# EAGLE board trasera_7_ea7gib6 (EAGLE 7.6.0), part 1 of 3
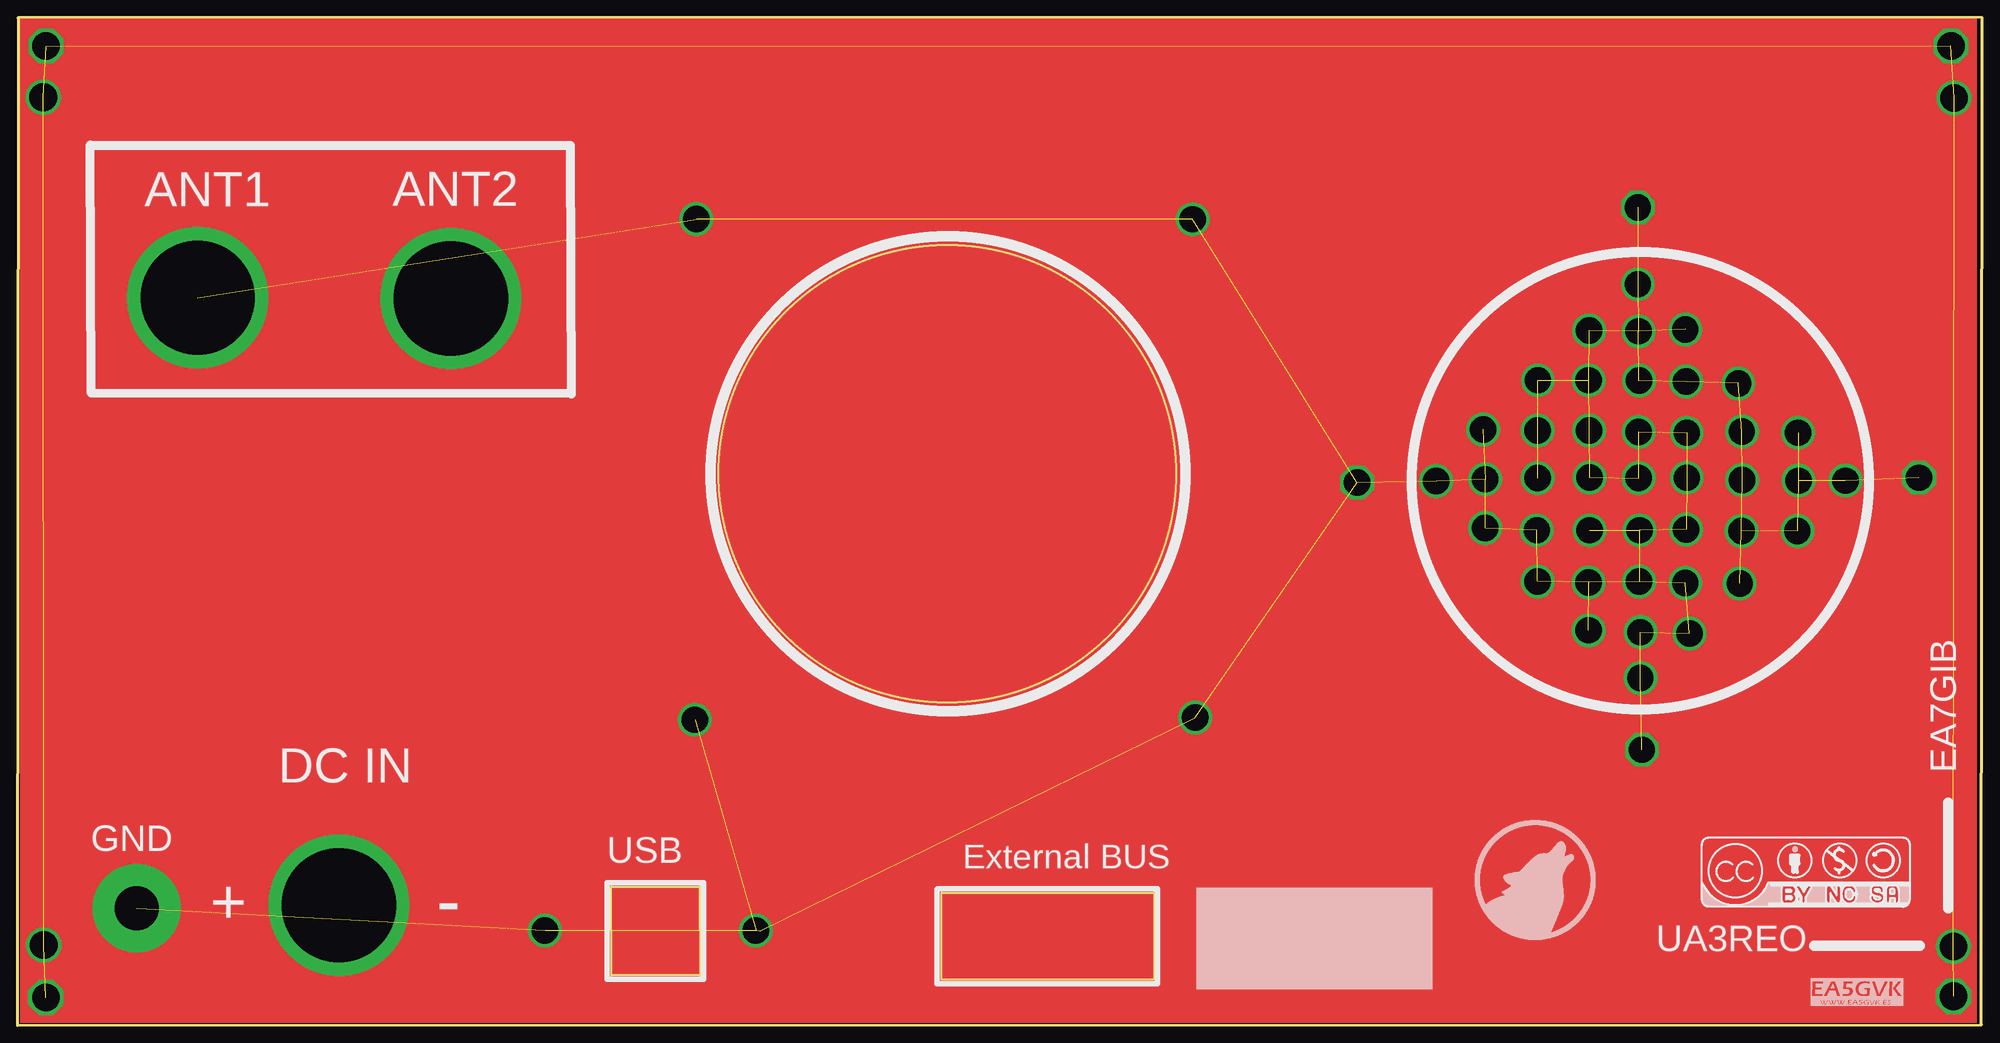
[diagram p0: board, top side]
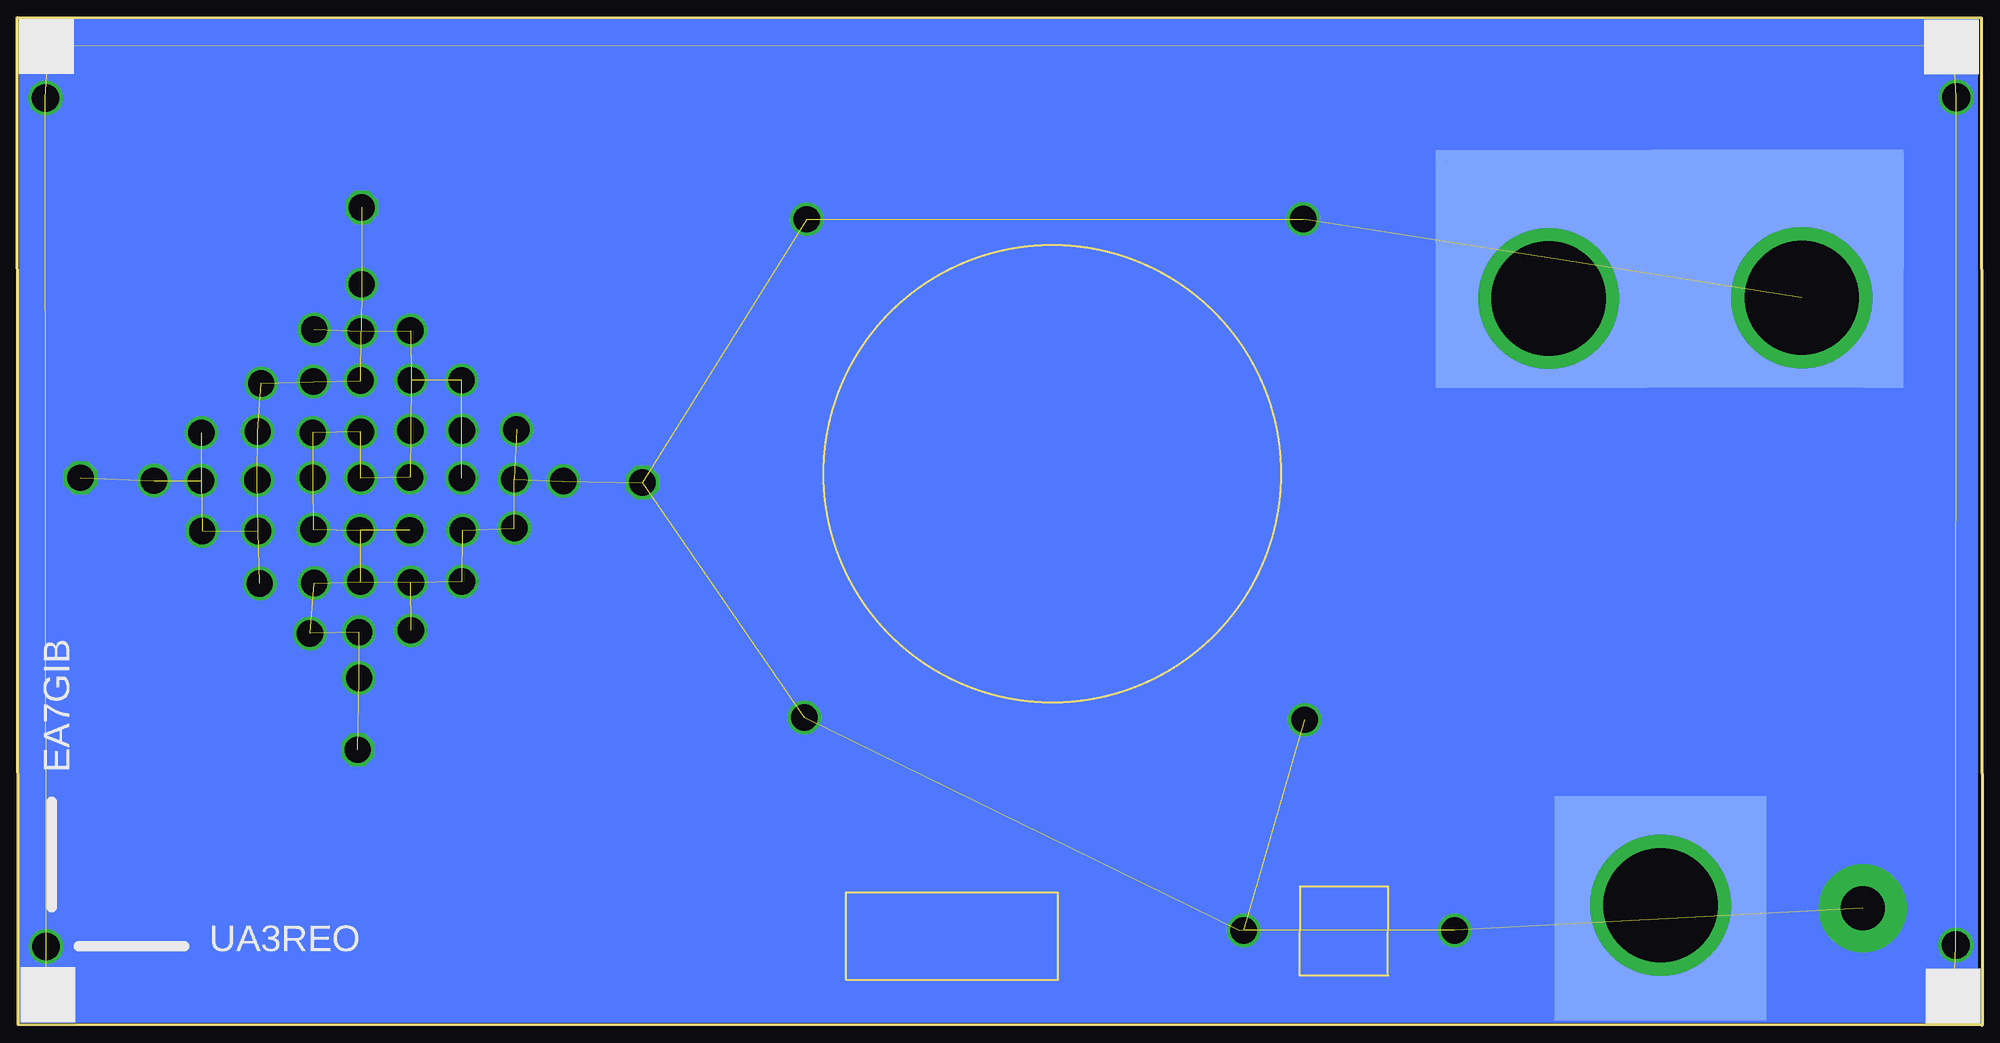
[diagram p1: board, bottom side, seen from below]

Size 283.9 x 145.6 mm. Coordinates in mm from the lower left corner, seen from the top.
Outline: 133.56,19.17 164.2,19.17 164.2,6.58 133.5,6.58 133.5,19.14
Outline: 85.83,20.03 98.6,20.03 98.63,7.22 85.83,7.22 85.8,19.96
Outline: 0,0 283.78,0.09 283.9,145.6 0.12,145.51 0,0
Outline: circle at 134.39,79.67 radius 33.02
Copper layers (1*16): Top 0.035mm / dielectric 1.5mm / Bottom 0.035mm
Design rules "default": minimum track width 10mil, minimum drill 24mil, track to track 8mil, track to pad 8mil, pad to pad 8mil, via to via 8mil, smd to smd 8mil, copper to edge 40mil, drill to drill 8mil, minimum pad ring 10mil, minimum via ring 8mil, stop-mask expansion 4mil, vias tented up to drill 0mil, thermal gap 10mil

## Footprints (pad centres in the part's own frame; a part is rotated, then mirrored left to right if it is on the bottom)
TP15SQ = smd 1.5 x 1.5: TP 0,0

## Placement (x,y rotation side)
E$1  [CC-NC-BY]  243.41,17.13 0 top
E$2  [TP15SQ]  12.1,125.24 0 bottom
E$3  [TP15SQ]  13.35,125.24 0 bottom
E$4  [TP15SQ]  12.1,123.78 0 bottom
E$5  [TP15SQ]  13.35,123.78 0 bottom
E$6  [TP15SQ]  12.1,122.38 0 bottom
E$7  [TP15SQ]  13.35,122.38 0 bottom
E$8  [TP15SQ]  12.1,120.98 0 bottom
E$9  [TP15SQ]  13.35,120.98 0 bottom
E$10  [TP15SQ]  12.1,119.51 0 bottom
E$11  [TP15SQ]  13.35,119.51 0 bottom
E$12  [TP15SQ]  12.1,118.11 0 bottom
E$13  [TP15SQ]  13.35,118.11 0 bottom
E$14  [TP15SQ]  14.3,125.24 0 bottom
E$15  [TP15SQ]  15.76,125.24 0 bottom
E$16  [TP15SQ]  18.44,125.24 0 bottom
E$17  [TP15SQ]  17.22,125.24 0 bottom
E$18  [TP15SQ]  19.54,125.24 0 bottom
E$19  [TP15SQ]  20.79,125.24 0 bottom
E$20  [EA5GVK1]  259.11,2.83 0 top
E$21  [TP15SQ]  14.3,123.78 0 bottom
E$22  [TP15SQ]  15.76,123.78 0 bottom
E$23  [TP15SQ]  18.44,123.78 0 bottom
E$24  [TP15SQ]  17.22,123.78 0 bottom
E$25  [TP15SQ]  19.54,123.78 0 bottom
E$26  [TP15SQ]  20.79,123.78 0 bottom
E$27  [TP15SQ]  14.3,122.38 0 bottom
E$28  [TP15SQ]  15.76,122.38 0 bottom
E$29  [TP15SQ]  18.44,122.38 0 bottom
E$30  [TP15SQ]  17.22,122.38 0 bottom
E$31  [TP15SQ]  19.54,122.38 0 bottom
E$32  [TP15SQ]  20.79,122.38 0 bottom
E$33  [TP15SQ]  14.3,120.98 0 bottom
E$34  [TP15SQ]  15.76,120.98 0 bottom
E$35  [TP15SQ]  18.44,120.98 0 bottom
E$36  [TP15SQ]  17.22,120.98 0 bottom
E$37  [TP15SQ]  19.54,120.98 0 bottom
E$38  [TP15SQ]  20.79,120.98 0 bottom
E$39  [TP15SQ]  14.3,119.51 0 bottom
E$40  [TP15SQ]  15.76,119.51 0 bottom
E$41  [TP15SQ]  18.44,119.51 0 bottom
E$42  [TP15SQ]  17.22,119.51 0 bottom
E$43  [TP15SQ]  19.54,119.51 0 bottom
E$44  [TP15SQ]  20.79,119.51 0 bottom
E$45  [TP15SQ]  14.3,118.11 0 bottom
E$46  [TP15SQ]  15.76,118.11 0 bottom
E$47  [TP15SQ]  18.44,118.11 0 bottom
E$48  [TP15SQ]  17.22,118.11 0 bottom
E$49  [TP15SQ]  19.54,118.11 0 bottom
E$50  [TP15SQ]  20.79,118.11 0 bottom
E$51  [TP15SQ]  12.1,117.1 0 bottom
E$52  [TP15SQ]  13.35,117.1 0 bottom
E$53  [TP15SQ]  12.1,115.64 0 bottom
E$54  [TP15SQ]  13.35,115.64 0 bottom
E$55  [TP15SQ]  12.1,114.24 0 bottom
E$56  [TP15SQ]  13.35,114.24 0 bottom
E$57  [TP15SQ]  12.1,112.84 0 bottom
E$58  [TP15SQ]  13.35,112.84 0 bottom
E$59  [TP15SQ]  12.1,111.37 0 bottom
E$60  [TP15SQ]  13.35,111.37 0 bottom
E$61  [TP15SQ]  12.1,109.97 0 bottom
E$62  [TP15SQ]  13.35,109.97 0 bottom
E$63  [TP15SQ]  14.3,117.1 0 bottom
E$64  [TP15SQ]  15.76,117.1 0 bottom
E$65  [TP15SQ]  18.44,117.1 0 bottom
E$66  [TP15SQ]  17.22,117.1 0 bottom
E$67  [TP15SQ]  19.54,117.1 0 bottom
E$68  [TP15SQ]  20.79,117.1 0 bottom
E$69  [TP15SQ]  14.3,115.64 0 bottom
E$70  [TP15SQ]  15.76,115.64 0 bottom
E$71  [TP15SQ]  18.44,115.64 0 bottom
E$72  [TP15SQ]  17.22,115.64 0 bottom
E$73  [TP15SQ]  19.54,115.64 0 bottom
E$74  [TP15SQ]  20.79,115.64 0 bottom
E$75  [TP15SQ]  14.3,114.24 0 bottom
E$76  [TP15SQ]  15.76,114.24 0 bottom
E$77  [TP15SQ]  18.44,114.24 0 bottom
E$78  [TP15SQ]  17.22,114.24 0 bottom
E$79  [TP15SQ]  19.54,114.24 0 bottom
E$80  [TP15SQ]  20.79,114.24 0 bottom
E$81  [TP15SQ]  14.3,112.84 0 bottom
E$82  [TP15SQ]  15.76,112.84 0 bottom
E$83  [TP15SQ]  18.44,112.84 0 bottom
E$84  [TP15SQ]  17.22,112.84 0 bottom
E$85  [TP15SQ]  19.54,112.84 0 bottom
E$86  [TP15SQ]  20.79,112.84 0 bottom
E$87  [TP15SQ]  14.3,111.37 0 bottom
E$88  [TP15SQ]  15.76,111.37 0 bottom
E$89  [TP15SQ]  18.44,111.37 0 bottom
E$90  [TP15SQ]  17.22,111.37 0 bottom
E$91  [TP15SQ]  19.54,111.37 0 bottom
E$92  [TP15SQ]  20.79,111.37 0 bottom
E$93  [TP15SQ]  14.3,109.97 0 bottom
E$94  [TP15SQ]  15.76,109.97 0 bottom
E$95  [TP15SQ]  18.44,109.97 0 bottom
E$96  [TP15SQ]  17.22,109.97 0 bottom
E$97  [TP15SQ]  19.54,109.97 0 bottom
E$98  [TP15SQ]  20.79,109.97 0 bottom
E$99  [TP15SQ]  12.13,109.64 0 bottom
E$100  [TP15SQ]  13.38,109.64 0 bottom
E$101  [TP15SQ]  12.13,108.17 0 bottom
E$102  [TP15SQ]  13.38,108.17 0 bottom
E$103  [TP15SQ]  12.13,106.77 0 bottom
E$104  [TP15SQ]  13.38,106.77 0 bottom
E$105  [TP15SQ]  12.13,105.37 0 bottom
E$106  [TP15SQ]  13.38,105.37 0 bottom
E$107  [TP15SQ]  12.13,103.91 0 bottom
E$108  [TP15SQ]  13.38,103.91 0 bottom
E$109  [TP15SQ]  12.13,102.5 0 bottom
E$110  [TP15SQ]  13.38,102.5 0 bottom
E$111  [TP15SQ]  14.33,109.64 0 bottom
E$112  [TP15SQ]  15.79,109.64 0 bottom
E$113  [TP15SQ]  18.47,109.64 0 bottom
E$114  [TP15SQ]  17.25,109.64 0 bottom
E$115  [TP15SQ]  19.57,109.64 0 bottom
E$116  [TP15SQ]  20.82,109.64 0 bottom
E$117  [TP15SQ]  14.33,108.17 0 bottom
E$118  [TP15SQ]  15.79,108.17 0 bottom
E$119  [TP15SQ]  18.47,108.17 0 bottom
E$120  [TP15SQ]  17.25,108.17 0 bottom
E$121  [TP15SQ]  19.57,108.17 0 bottom
E$122  [TP15SQ]  20.82,108.17 0 bottom
E$123  [TP15SQ]  14.33,106.77 0 bottom
E$124  [TP15SQ]  15.79,106.77 0 bottom
E$125  [TP15SQ]  18.47,106.77 0 bottom
E$126  [TP15SQ]  17.25,106.77 0 bottom
E$127  [TP15SQ]  19.57,106.77 0 bottom
E$128  [TP15SQ]  20.82,106.77 0 bottom
E$129  [TP15SQ]  14.33,105.37 0 bottom
E$130  [TP15SQ]  15.79,105.37 0 bottom
E$131  [TP15SQ]  18.47,105.37 0 bottom
E$132  [TP15SQ]  17.25,105.37 0 bottom
E$133  [TP15SQ]  19.57,105.37 0 bottom
E$134  [TP15SQ]  20.82,105.37 0 bottom
E$135  [TP15SQ]  14.33,103.91 0 bottom
E$136  [TP15SQ]  15.79,103.91 0 bottom
E$137  [TP15SQ]  18.47,103.91 0 bottom
E$138  [TP15SQ]  17.25,103.91 0 bottom
E$139  [TP15SQ]  19.57,103.91 0 bottom
E$140  [TP15SQ]  20.82,103.91 0 bottom
E$141  [TP15SQ]  14.33,102.5 0 bottom
E$142  [TP15SQ]  15.79,102.5 0 bottom
E$143  [TP15SQ]  18.47,102.5 0 bottom
E$144  [TP15SQ]  17.25,102.5 0 bottom
E$145  [TP15SQ]  19.57,102.5 0 bottom
E$146  [TP15SQ]  20.82,102.5 0 bottom
E$147  [TP15SQ]  12.13,101.5 0 bottom
E$148  [TP15SQ]  13.38,101.5 0 bottom
E$149  [TP15SQ]  12.13,100.04 0 bottom
E$150  [TP15SQ]  13.38,100.04 0 bottom
E$151  [TP15SQ]  12.13,98.63 0 bottom
E$152  [TP15SQ]  13.38,98.63 0 bottom
E$153  [TP15SQ]  12.13,97.23 0 bottom
E$154  [TP15SQ]  13.38,97.23 0 bottom
E$155  [TP15SQ]  12.13,95.77 0 bottom
E$156  [TP15SQ]  13.38,95.77 0 bottom
E$157  [TP15SQ]  14.33,101.5 0 bottom
E$158  [TP15SQ]  15.79,101.5 0 bottom
E$159  [TP15SQ]  18.47,101.5 0 bottom
E$160  [TP15SQ]  17.25,101.5 0 bottom
E$161  [TP15SQ]  19.57,101.5 0 bottom
E$162  [TP15SQ]  20.82,101.5 0 bottom
E$163  [TP15SQ]  14.33,100.04 0 bottom
E$164  [TP15SQ]  15.79,100.04 0 bottom
E$165  [TP15SQ]  18.47,100.04 0 bottom
E$166  [TP15SQ]  17.25,100.04 0 bottom
E$167  [TP15SQ]  19.57,100.04 0 bottom
E$168  [TP15SQ]  20.82,100.04 0 bottom
E$169  [TP15SQ]  14.33,98.63 0 bottom
E$170  [TP15SQ]  15.79,98.63 0 bottom
E$171  [TP15SQ]  18.47,98.63 0 bottom
E$172  [TP15SQ]  17.25,98.63 0 bottom
E$173  [TP15SQ]  19.57,98.63 0 bottom
E$174  [TP15SQ]  20.82,98.63 0 bottom
E$175  [TP15SQ]  14.33,97.23 0 bottom
E$176  [TP15SQ]  15.79,97.23 0 bottom
E$177  [TP15SQ]  18.47,97.23 0 bottom
E$178  [TP15SQ]  17.25,97.23 0 bottom
E$179  [TP15SQ]  19.57,97.23 0 bottom
E$180  [TP15SQ]  20.82,97.23 0 bottom
E$181  [TP15SQ]  14.33,95.77 0 bottom
E$182  [TP15SQ]  15.79,95.77 0 bottom
E$183  [TP15SQ]  18.47,95.77 0 bottom
E$184  [TP15SQ]  17.25,95.77 0 bottom
E$185  [TP15SQ]  19.57,95.77 0 bottom
E$186  [TP15SQ]  20.82,95.77 0 bottom
E$187  [TP15SQ]  21.46,125.24 0 bottom
E$188  [TP15SQ]  22.92,125.24 0 bottom
E$189  [TP15SQ]  21.46,123.78 0 bottom
E$190  [TP15SQ]  22.92,123.78 0 bottom
E$191  [TP15SQ]  21.46,122.38 0 bottom
E$192  [TP15SQ]  22.92,122.38 0 bottom
E$193  [TP15SQ]  21.46,120.98 0 bottom
E$194  [TP15SQ]  22.92,120.98 0 bottom
E$195  [TP15SQ]  21.46,119.51 0 bottom
E$196  [TP15SQ]  22.92,119.51 0 bottom
E$197  [TP15SQ]  21.46,118.11 0 bottom
E$198  [TP15SQ]  22.92,118.11 0 bottom
E$199  [TP15SQ]  21.46,117.1 0 bottom
E$200  [TP15SQ]  22.92,117.1 0 bottom
E$201  [TP15SQ]  21.46,115.64 0 bottom
E$202  [TP15SQ]  22.92,115.64 0 bottom
E$203  [TP15SQ]  21.46,114.24 0 bottom
E$204  [TP15SQ]  22.92,114.24 0 bottom
E$205  [TP15SQ]  21.46,112.84 0 bottom
E$206  [TP15SQ]  22.92,112.84 0 bottom
E$207  [TP15SQ]  21.46,111.37 0 bottom
E$208  [TP15SQ]  22.92,111.37 0 bottom
E$209  [TP15SQ]  21.46,109.97 0 bottom
E$210  [TP15SQ]  22.92,109.97 0 bottom
E$211  [TP15SQ]  21.49,109.64 0 bottom
E$212  [TP15SQ]  22.95,109.64 0 bottom
E$213  [TP15SQ]  21.49,108.17 0 bottom
E$214  [TP15SQ]  22.95,108.17 0 bottom
E$215  [TP15SQ]  21.49,106.77 0 bottom
E$216  [TP15SQ]  22.95,106.77 0 bottom
E$217  [TP15SQ]  21.49,105.37 0 bottom
E$218  [TP15SQ]  22.95,105.37 0 bottom
E$219  [TP15SQ]  21.49,103.91 0 bottom
E$220  [TP15SQ]  22.95,103.91 0 bottom
E$221  [TP15SQ]  21.49,102.5 0 bottom
E$222  [TP15SQ]  22.95,102.5 0 bottom
E$223  [TP15SQ]  21.49,101.5 0 bottom
E$224  [TP15SQ]  22.95,101.5 0 bottom
E$225  [TP15SQ]  21.49,100.04 0 bottom
E$226  [TP15SQ]  22.95,100.04 0 bottom
E$227  [TP15SQ]  21.49,98.63 0 bottom
E$228  [TP15SQ]  22.95,98.63 0 bottom
E$229  [TP15SQ]  21.49,97.23 0 bottom
E$230  [TP15SQ]  22.95,97.23 0 bottom
E$231  [TP15SQ]  21.49,95.77 0 bottom
E$232  [TP15SQ]  22.95,95.77 0 bottom
E$233  [TP15SQ]  22.95,125.21 0 bottom
E$234  [TP15SQ]  22.95,123.75 0 bottom
E$235  [TP15SQ]  22.95,122.35 0 bottom
E$236  [TP15SQ]  22.95,120.94 0 bottom
E$237  [TP15SQ]  22.95,119.48 0 bottom
E$238  [TP15SQ]  22.95,118.08 0 bottom
E$239  [TP15SQ]  22.95,117.07 0 bottom
E$240  [TP15SQ]  22.95,115.61 0 bottom
E$241  [TP15SQ]  22.95,114.21 0 bottom
E$242  [TP15SQ]  22.95,112.81 0 bottom
E$243  [TP15SQ]  22.95,111.34 0 bottom
E$244  [TP15SQ]  22.95,109.94 0 bottom
E$245  [TP15SQ]  22.98,109.61 0 bottom
E$246  [TP15SQ]  22.98,108.14 0 bottom
E$247  [TP15SQ]  22.98,106.74 0 bottom
E$248  [TP15SQ]  22.98,105.34 0 bottom
E$249  [TP15SQ]  22.98,103.88 0 bottom
E$250  [TP15SQ]  22.98,102.47 0 bottom
E$251  [TP15SQ]  22.98,101.47 0 bottom
E$252  [TP15SQ]  22.98,100 0 bottom
E$253  [TP15SQ]  22.98,98.6 0 bottom
E$254  [TP15SQ]  22.98,97.2 0 bottom
E$255  [TP15SQ]  22.98,95.74 0 bottom
E$256  [TP15SQ]  12.13,125.73 0 bottom
E$257  [TP15SQ]  13.38,125.73 0 bottom
E$258  [TP15SQ]  12.13,124.33 0 bottom
E$259  [TP15SQ]  13.38,124.33 0 bottom
E$260  [TP15SQ]  12.13,122.93 0 bottom
E$261  [TP15SQ]  13.38,122.93 0 bottom
E$262  [TP15SQ]  12.13,121.46 0 bottom
E$263  [TP15SQ]  13.38,121.46 0 bottom
E$264  [TP15SQ]  12.13,120.06 0 bottom
E$265  [TP15SQ]  13.38,120.06 0 bottom
E$266  [TP15SQ]  14.33,125.73 0 bottom
E$267  [TP15SQ]  15.79,125.73 0 bottom
E$268  [TP15SQ]  18.47,125.73 0 bottom
E$269  [TP15SQ]  17.25,125.73 0 bottom
E$270  [TP15SQ]  19.57,125.73 0 bottom
E$271  [TP15SQ]  20.82,125.73 0 bottom
E$272  [TP15SQ]  14.33,124.33 0 bottom
E$273  [TP15SQ]  15.79,124.33 0 bottom
E$274  [TP15SQ]  18.47,124.33 0 bottom
E$275  [TP15SQ]  17.25,124.33 0 bottom
E$276  [TP15SQ]  19.57,124.33 0 bottom
E$277  [TP15SQ]  20.82,124.33 0 bottom
E$278  [TP15SQ]  14.33,122.93 0 bottom
E$279  [TP15SQ]  15.79,122.93 0 bottom
E$280  [TP15SQ]  18.47,122.93 0 bottom
E$281  [TP15SQ]  17.25,122.93 0 bottom
E$282  [TP15SQ]  19.57,122.93 0 bottom
E$283  [TP15SQ]  20.82,122.93 0 bottom
E$284  [TP15SQ]  14.33,121.46 0 bottom
E$285  [TP15SQ]  15.79,121.46 0 bottom
E$286  [TP15SQ]  18.47,121.46 0 bottom
E$287  [TP15SQ]  17.25,121.46 0 bottom
E$288  [TP15SQ]  19.57,121.46 0 bottom
E$289  [TP15SQ]  20.82,121.46 0 bottom
E$290  [TP15SQ]  14.33,120.06 0 bottom
E$291  [TP15SQ]  15.79,120.06 0 bottom
E$292  [TP15SQ]  18.47,120.06 0 bottom
E$293  [TP15SQ]  17.25,120.06 0 bottom
E$294  [TP15SQ]  19.57,120.06 0 bottom
E$295  [TP15SQ]  20.82,120.06 0 bottom
E$296  [TP15SQ]  21.28,125.67 0 bottom
E$297  [TP15SQ]  22.74,125.67 0 bottom
E$298  [TP15SQ]  21.28,124.27 0 bottom
E$299  [TP15SQ]  22.74,124.27 0 bottom
E$300  [TP15SQ]  21.28,122.86 0 bottom
E$301  [TP15SQ]  22.74,122.86 0 bottom
E$302  [TP15SQ]  21.28,121.4 0 bottom
E$303  [TP15SQ]  22.74,121.4 0 bottom
E$304  [TP15SQ]  21.28,120 0 bottom
E$305  [TP15SQ]  22.74,120 0 bottom
E$306  [TP15SQ]  12.16,94.64 0 bottom
E$307  [TP15SQ]  12.16,93.36 0 bottom
E$308  [TP15SQ]  12.16,92.87 0 bottom
E$309  [TP15SQ]  13.62,94.4 0 bottom
E$310  [TP15SQ]  13.59,92.87 0 bottom
E$311  [TP15SQ]  15.06,92.87 0 bottom
E$312  [TP15SQ]  16.43,92.87 0 bottom
E$313  [TP15SQ]  14.78,94.18 0 bottom
E$314  [TP15SQ]  14.75,94.58 0 bottom
E$315  [TP15SQ]  16,94.58 0 bottom
E$316  [TP15SQ]  17.19,94.18 0 bottom
E$317  [TP15SQ]  16.03,93.97 0 bottom
E$579  [TP15SQ]  17.86,123.78 0 bottom
E$580  [TP15SQ]  19.32,123.78 0 bottom
E$581  [TP15SQ]  22.01,123.78 0 bottom
E$582  [TP15SQ]  20.79,123.78 0 bottom
E$583  [TP15SQ]  23.1,123.78 0 bottom
E$584  [TP15SQ]  24.35,123.78 0 bottom
E$585  [TP15SQ]  17.86,122.32 0 bottom
E$586  [TP15SQ]  19.32,122.32 0 bottom
E$587  [TP15SQ]  22.01,122.32 0 bottom
E$588  [TP15SQ]  20.79,122.32 0 bottom
E$589  [TP15SQ]  23.1,122.32 0 bottom
E$590  [TP15SQ]  24.35,122.32 0 bottom
E$591  [TP15SQ]  17.86,120.91 0 bottom
E$592  [TP15SQ]  19.32,120.91 0 bottom
E$593  [TP15SQ]  22.01,120.91 0 bottom
E$594  [TP15SQ]  20.79,120.91 0 bottom
E$595  [TP15SQ]  23.1,120.91 0 bottom
E$596  [TP15SQ]  24.35,120.91 0 bottom
E$597  [TP15SQ]  17.86,119.51 0 bottom
E$598  [TP15SQ]  19.32,119.51 0 bottom
E$599  [TP15SQ]  22.01,119.51 0 bottom
E$600  [TP15SQ]  20.79,119.51 0 bottom
E$601  [TP15SQ]  23.1,119.51 0 bottom
E$602  [TP15SQ]  24.35,119.51 0 bottom
E$603  [TP15SQ]  17.86,118.05 0 bottom
E$604  [TP15SQ]  19.32,118.05 0 bottom
E$605  [TP15SQ]  22.01,118.05 0 bottom
E$606  [TP15SQ]  20.79,118.05 0 bottom
E$607  [TP15SQ]  23.1,118.05 0 bottom
E$608  [TP15SQ]  24.35,118.05 0 bottom
E$609  [TP15SQ]  17.86,116.65 0 bottom
E$610  [TP15SQ]  19.32,116.65 0 bottom
E$611  [TP15SQ]  22.01,116.65 0 bottom
E$612  [TP15SQ]  20.79,116.65 0 bottom
E$613  [TP15SQ]  23.1,116.65 0 bottom
E$614  [TP15SQ]  24.35,116.65 0 bottom
E$615  [TP15SQ]  25.3,123.78 0 bottom
E$616  [TP15SQ]  26.76,123.78 0 bottom
E$617  [TP15SQ]  29.44,123.78 0 bottom
E$618  [TP15SQ]  28.22,123.78 0 bottom
E$619  [TP15SQ]  30.54,123.78 0 bottom
E$620  [TP15SQ]  31.79,123.78 0 bottom
E$621  [TP15SQ]  25.3,122.32 0 bottom
E$622  [TP15SQ]  26.76,122.32 0 bottom
E$623  [TP15SQ]  29.44,122.32 0 bottom
E$624  [TP15SQ]  28.22,122.32 0 bottom
E$625  [TP15SQ]  30.54,122.32 0 bottom
E$626  [TP15SQ]  31.79,122.32 0 bottom
E$627  [TP15SQ]  25.3,120.91 0 bottom
E$628  [TP15SQ]  26.76,120.91 0 bottom
E$629  [TP15SQ]  29.44,120.91 0 bottom
E$630  [TP15SQ]  28.22,120.91 0 bottom
E$631  [TP15SQ]  30.54,120.91 0 bottom
E$632  [TP15SQ]  31.79,120.91 0 bottom
E$633  [TP15SQ]  25.3,119.51 0 bottom
E$634  [TP15SQ]  26.76,119.51 0 bottom
E$635  [TP15SQ]  29.44,119.51 0 bottom
E$636  [TP15SQ]  28.22,119.51 0 bottom
E$637  [TP15SQ]  30.54,119.51 0 bottom
E$638  [TP15SQ]  31.79,119.51 0 bottom
E$639  [TP15SQ]  25.3,118.05 0 bottom
E$640  [TP15SQ]  26.76,118.05 0 bottom
E$641  [TP15SQ]  29.44,118.05 0 bottom
E$642  [TP15SQ]  28.22,118.05 0 bottom
E$643  [TP15SQ]  30.54,118.05 0 bottom
E$644  [TP15SQ]  31.79,118.05 0 bottom
E$645  [TP15SQ]  25.3,116.65 0 bottom
E$646  [TP15SQ]  26.76,116.65 0 bottom
E$647  [TP15SQ]  29.44,116.65 0 bottom
E$648  [TP15SQ]  28.22,116.65 0 bottom
E$649  [TP15SQ]  30.54,116.65 0 bottom
E$650  [TP15SQ]  31.79,116.65 0 bottom
E$651  [TP15SQ]  33.04,123.78 0 bottom
E$652  [TP15SQ]  34.5,123.78 0 bottom
E$653  [TP15SQ]  37.19,123.78 0 bottom
E$654  [TP15SQ]  35.97,123.78 0 bottom
E$655  [TP15SQ]  38.28,123.78 0 bottom
E$656  [TP15SQ]  39.53,123.78 0 bottom
E$657  [TP15SQ]  33.04,122.32 0 bottom
E$658  [TP15SQ]  34.5,122.32 0 bottom
E$659  [TP15SQ]  37.19,122.32 0 bottom
E$660  [TP15SQ]  35.97,122.32 0 bottom
E$661  [TP15SQ]  38.28,122.32 0 bottom
E$662  [TP15SQ]  39.53,122.32 0 bottom
E$663  [TP15SQ]  33.04,120.91 0 bottom
E$664  [TP15SQ]  34.5,120.91 0 bottom
E$665  [TP15SQ]  37.19,120.91 0 bottom
E$666  [TP15SQ]  35.97,120.91 0 bottom
E$667  [TP15SQ]  38.28,120.91 0 bottom
E$668  [TP15SQ]  39.53,120.91 0 bottom
E$669  [TP15SQ]  33.04,119.51 0 bottom
E$670  [TP15SQ]  34.5,119.51 0 bottom
E$671  [TP15SQ]  37.19,119.51 0 bottom
E$672  [TP15SQ]  35.97,119.51 0 bottom
E$673  [TP15SQ]  38.28,119.51 0 bottom
E$674  [TP15SQ]  39.53,119.51 0 bottom
E$675  [TP15SQ]  33.04,118.05 0 bottom
E$676  [TP15SQ]  34.5,118.05 0 bottom
E$677  [TP15SQ]  37.19,118.05 0 bottom
E$678  [TP15SQ]  35.97,118.05 0 bottom
E$679  [TP15SQ]  38.28,118.05 0 bottom
E$680  [TP15SQ]  39.53,118.05 0 bottom
E$681  [TP15SQ]  33.04,116.65 0 bottom
E$682  [TP15SQ]  34.5,116.65 0 bottom
E$683  [TP15SQ]  37.19,116.65 0 bottom
E$684  [TP15SQ]  35.97,116.65 0 bottom
E$685  [TP15SQ]  38.28,116.65 0 bottom
E$686  [TP15SQ]  39.53,116.65 0 bottom
E$687  [TP15SQ]  40.48,123.78 0 bottom
E$688  [TP15SQ]  41.94,123.78 0 bottom
E$689  [TP15SQ]  44.62,123.78 0 bottom
E$690  [TP15SQ]  43.4,123.78 0 bottom
E$691  [TP15SQ]  45.72,123.78 0 bottom
E$692  [TP15SQ]  46.97,123.78 0 bottom
E$693  [TP15SQ]  40.48,122.32 0 bottom
E$694  [TP15SQ]  41.94,122.32 0 bottom
E$695  [TP15SQ]  44.62,122.32 0 bottom
E$696  [TP15SQ]  43.4,122.32 0 bottom
E$697  [TP15SQ]  45.72,122.32 0 bottom
E$698  [TP15SQ]  46.97,122.32 0 bottom
E$699  [TP15SQ]  40.48,120.91 0 bottom
E$700  [TP15SQ]  41.94,120.91 0 bottom
E$701  [TP15SQ]  44.62,120.91 0 bottom
E$702  [TP15SQ]  43.4,120.91 0 bottom
E$703  [TP15SQ]  45.72,120.91 0 bottom
E$704  [TP15SQ]  46.97,120.91 0 bottom
E$705  [TP15SQ]  40.48,119.51 0 bottom
E$706  [TP15SQ]  41.94,119.51 0 bottom
E$707  [TP15SQ]  44.62,119.51 0 bottom
E$708  [TP15SQ]  43.4,119.51 0 bottom
E$709  [TP15SQ]  45.72,119.51 0 bottom
E$710  [TP15SQ]  46.97,119.51 0 bottom
E$711  [TP15SQ]  40.48,118.05 0 bottom
E$712  [TP15SQ]  41.94,118.05 0 bottom
E$713  [TP15SQ]  44.62,118.05 0 bottom
E$714  [TP15SQ]  43.4,118.05 0 bottom
E$715  [TP15SQ]  45.72,118.05 0 bottom
E$716  [TP15SQ]  46.97,118.05 0 bottom
E$717  [TP15SQ]  40.48,116.65 0 bottom
E$718  [TP15SQ]  41.94,116.65 0 bottom
E$719  [TP15SQ]  44.62,116.65 0 bottom
E$720  [TP15SQ]  43.4,116.65 0 bottom
E$721  [TP15SQ]  45.72,116.65 0 bottom
E$722  [TP15SQ]  46.97,116.65 0 bottom
E$723  [TP15SQ]  17.86,115.64 0 bottom
E$724  [TP15SQ]  19.32,115.64 0 bottom
E$725  [TP15SQ]  22.01,115.64 0 bottom
E$726  [TP15SQ]  20.79,115.64 0 bottom
E$727  [TP15SQ]  23.1,115.64 0 bottom
E$728  [TP15SQ]  24.35,115.64 0 bottom
E$729  [TP15SQ]  17.86,114.18 0 bottom
E$730  [TP15SQ]  19.32,114.18 0 bottom
E$731  [TP15SQ]  22.01,114.18 0 bottom
E$732  [TP15SQ]  20.79,114.18 0 bottom
E$733  [TP15SQ]  23.1,114.18 0 bottom
E$734  [TP15SQ]  24.35,114.18 0 bottom
E$735  [TP15SQ]  17.86,112.78 0 bottom
E$736  [TP15SQ]  19.32,112.78 0 bottom
E$737  [TP15SQ]  22.01,112.78 0 bottom
E$738  [TP15SQ]  20.79,112.78 0 bottom
E$739  [TP15SQ]  23.1,112.78 0 bottom
E$740  [TP15SQ]  24.35,112.78 0 bottom
E$741  [TP15SQ]  17.86,111.37 0 bottom
E$742  [TP15SQ]  19.32,111.37 0 bottom
E$743  [TP15SQ]  22.01,111.37 0 bottom
E$744  [TP15SQ]  20.79,111.37 0 bottom
E$745  [TP15SQ]  23.1,111.37 0 bottom
E$746  [TP15SQ]  24.35,111.37 0 bottom
E$747  [TP15SQ]  17.86,109.91 0 bottom
E$748  [TP15SQ]  19.32,109.91 0 bottom
E$749  [TP15SQ]  22.01,109.91 0 bottom
E$750  [TP15SQ]  20.79,109.91 0 bottom
E$751  [TP15SQ]  23.1,109.91 0 bottom
E$752  [TP15SQ]  24.35,109.91 0 bottom
E$753  [TP15SQ]  17.86,108.51 0 bottom
E$754  [TP15SQ]  19.32,108.51 0 bottom
E$755  [TP15SQ]  22.01,108.51 0 bottom
E$756  [TP15SQ]  20.79,108.51 0 bottom
E$757  [TP15SQ]  23.1,108.51 0 bottom
E$758  [TP15SQ]  24.35,108.51 0 bottom
E$759  [TP15SQ]  25.3,115.64 0 bottom
E$760  [TP15SQ]  26.76,115.64 0 bottom
E$761  [TP15SQ]  29.44,115.64 0 bottom
E$762  [TP15SQ]  28.22,115.64 0 bottom
E$763  [TP15SQ]  30.54,115.64 0 bottom
E$764  [TP15SQ]  31.79,115.64 0 bottom
E$765  [TP15SQ]  25.3,114.18 0 bottom
E$766  [TP15SQ]  26.76,114.18 0 bottom
E$767  [TP15SQ]  29.44,114.18 0 bottom
E$768  [TP15SQ]  28.22,114.18 0 bottom
E$769  [TP15SQ]  30.54,114.18 0 bottom
E$770  [TP15SQ]  31.79,114.18 0 bottom
E$771  [TP15SQ]  25.3,112.78 0 bottom
E$772  [TP15SQ]  26.76,112.78 0 bottom
E$773  [TP15SQ]  29.44,112.78 0 bottom
E$774  [TP15SQ]  28.22,112.78 0 bottom
E$775  [TP15SQ]  30.54,112.78 0 bottom
E$776  [TP15SQ]  31.79,112.78 0 bottom
E$777  [TP15SQ]  25.3,111.37 0 bottom
E$778  [TP15SQ]  26.76,111.37 0 bottom
E$779  [TP15SQ]  29.44,111.37 0 bottom
E$780  [TP15SQ]  28.22,111.37 0 bottom
E$781  [TP15SQ]  30.54,111.37 0 bottom
E$782  [TP15SQ]  31.79,111.37 0 bottom
E$783  [TP15SQ]  25.3,109.91 0 bottom
E$784  [TP15SQ]  26.76,109.91 0 bottom
E$785  [TP15SQ]  29.44,109.91 0 bottom
E$786  [TP15SQ]  28.22,109.91 0 bottom
E$787  [TP15SQ]  30.54,109.91 0 bottom
E$788  [TP15SQ]  31.79,109.91 0 bottom
E$789  [TP15SQ]  25.3,108.51 0 bottom
E$790  [TP15SQ]  26.76,108.51 0 bottom
E$791  [TP15SQ]  29.44,108.51 0 bottom
E$792  [TP15SQ]  28.22,108.51 0 bottom
E$793  [TP15SQ]  30.54,108.51 0 bottom
E$794  [TP15SQ]  31.79,108.51 0 bottom
E$795  [TP15SQ]  33.04,115.64 0 bottom
E$796  [TP15SQ]  34.5,115.64 0 bottom
E$797  [TP15SQ]  37.19,115.64 0 bottom
E$798  [TP15SQ]  35.97,115.64 0 bottom
E$799  [TP15SQ]  38.28,115.64 0 bottom
E$800  [TP15SQ]  39.53,115.64 0 bottom
E$801  [TP15SQ]  33.04,114.18 0 bottom
E$802  [TP15SQ]  34.5,114.18 0 bottom
E$803  [TP15SQ]  37.19,114.18 0 bottom
E$804  [TP15SQ]  35.97,114.18 0 bottom
E$805  [TP15SQ]  38.28,114.18 0 bottom
E$806  [TP15SQ]  39.53,114.18 0 bottom
E$807  [TP15SQ]  33.04,112.78 0 bottom
E$808  [TP15SQ]  34.5,112.78 0 bottom
E$809  [TP15SQ]  37.19,112.78 0 bottom
E$810  [TP15SQ]  35.97,112.78 0 bottom
E$811  [TP15SQ]  38.28,112.78 0 bottom
E$812  [TP15SQ]  39.53,112.78 0 bottom
E$813  [TP15SQ]  33.04,111.37 0 bottom
E$814  [TP15SQ]  34.5,111.37 0 bottom
E$815  [TP15SQ]  37.19,111.37 0 bottom
E$816  [TP15SQ]  35.97,111.37 0 bottom
E$817  [TP15SQ]  38.28,111.37 0 bottom
E$818  [TP15SQ]  39.53,111.37 0 bottom
E$819  [TP15SQ]  33.04,109.91 0 bottom
E$820  [TP15SQ]  34.5,109.91 0 bottom
E$821  [TP15SQ]  37.19,109.91 0 bottom
E$822  [TP15SQ]  35.97,109.91 0 bottom
E$823  [TP15SQ]  38.28,109.91 0 bottom
E$824  [TP15SQ]  39.53,109.91 0 bottom
E$825  [TP15SQ]  33.04,108.51 0 bottom
E$826  [TP15SQ]  34.5,108.51 0 bottom
E$827  [TP15SQ]  37.19,108.51 0 bottom
E$828  [TP15SQ]  35.97,108.51 0 bottom
E$829  [TP15SQ]  38.28,108.51 0 bottom
E$830  [TP15SQ]  39.53,108.51 0 bottom
E$831  [TP15SQ]  40.48,115.64 0 bottom
E$832  [TP15SQ]  41.94,115.64 0 bottom
E$833  [TP15SQ]  44.62,115.64 0 bottom
E$834  [TP15SQ]  43.4,115.64 0 bottom
E$835  [TP15SQ]  45.72,115.64 0 bottom
E$836  [TP15SQ]  46.97,115.64 0 bottom
E$837  [TP15SQ]  40.48,114.18 0 bottom
E$838  [TP15SQ]  41.94,114.18 0 bottom
E$839  [TP15SQ]  44.62,114.18 0 bottom
E$840  [TP15SQ]  43.4,114.18 0 bottom
E$841  [TP15SQ]  45.72,114.18 0 bottom
E$842  [TP15SQ]  46.97,114.18 0 bottom
E$843  [TP15SQ]  40.48,112.78 0 bottom
E$844  [TP15SQ]  41.94,112.78 0 bottom
E$845  [TP15SQ]  44.62,112.78 0 bottom
E$846  [TP15SQ]  43.4,112.78 0 bottom
E$847  [TP15SQ]  45.72,112.78 0 bottom
E$848  [TP15SQ]  46.97,112.78 0 bottom
E$849  [TP15SQ]  40.48,111.37 0 bottom
E$850  [TP15SQ]  41.94,111.37 0 bottom
E$851  [TP15SQ]  44.62,111.37 0 bottom
E$852  [TP15SQ]  43.4,111.37 0 bottom
E$853  [TP15SQ]  45.72,111.37 0 bottom
E$854  [TP15SQ]  46.97,111.37 0 bottom
E$855  [TP15SQ]  40.48,109.91 0 bottom
E$856  [TP15SQ]  41.94,109.91 0 bottom
E$857  [TP15SQ]  44.62,109.91 0 bottom
E$858  [TP15SQ]  43.4,109.91 0 bottom
E$859  [TP15SQ]  45.72,109.91 0 bottom
E$860  [TP15SQ]  46.97,109.91 0 bottom
E$861  [TP15SQ]  40.48,108.51 0 bottom
E$862  [TP15SQ]  41.94,108.51 0 bottom
E$863  [TP15SQ]  44.62,108.51 0 bottom
E$864  [TP15SQ]  43.4,108.51 0 bottom
E$865  [TP15SQ]  45.72,108.51 0 bottom
E$866  [TP15SQ]  46.97,108.51 0 bottom
E$867  [TP15SQ]  17.89,108.17 0 bottom
E$868  [TP15SQ]  19.35,108.17 0 bottom
E$869  [TP15SQ]  22.04,108.17 0 bottom
E$870  [TP15SQ]  20.82,108.17 0 bottom
E$871  [TP15SQ]  23.13,108.17 0 bottom
E$872  [TP15SQ]  24.38,108.17 0 bottom
E$873  [TP15SQ]  17.89,106.71 0 bottom
E$874  [TP15SQ]  19.35,106.71 0 bottom
E$875  [TP15SQ]  22.04,106.71 0 bottom
E$876  [TP15SQ]  20.82,106.71 0 bottom
E$877  [TP15SQ]  23.13,106.71 0 bottom
E$878  [TP15SQ]  24.38,106.71 0 bottom
E$879  [TP15SQ]  17.89,105.31 0 bottom
E$880  [TP15SQ]  19.35,105.31 0 bottom
E$881  [TP15SQ]  22.04,105.31 0 bottom
E$882  [TP15SQ]  20.82,105.31 0 bottom
E$883  [TP15SQ]  23.13,105.31 0 bottom
E$884  [TP15SQ]  24.38,105.31 0 bottom
E$885  [TP15SQ]  17.89,103.91 0 bottom
E$886  [TP15SQ]  19.35,103.91 0 bottom
E$887  [TP15SQ]  22.04,103.91 0 bottom
E$888  [TP15SQ]  20.82,103.91 0 bottom
E$889  [TP15SQ]  23.13,103.91 0 bottom
E$890  [TP15SQ]  24.38,103.91 0 bottom
E$891  [TP15SQ]  17.89,102.44 0 bottom
E$892  [TP15SQ]  19.35,102.44 0 bottom
E$893  [TP15SQ]  22.04,102.44 0 bottom
E$894  [TP15SQ]  20.82,102.44 0 bottom
E$895  [TP15SQ]  23.13,102.44 0 bottom
E$896  [TP15SQ]  24.38,102.44 0 bottom
E$897  [TP15SQ]  17.89,101.04 0 bottom
E$898  [TP15SQ]  19.35,101.04 0 bottom
E$899  [TP15SQ]  22.04,101.04 0 bottom
E$900  [TP15SQ]  20.82,101.04 0 bottom
E$901  [TP15SQ]  23.13,101.04 0 bottom
E$902  [TP15SQ]  24.38,101.04 0 bottom
E$903  [TP15SQ]  25.33,108.17 0 bottom
E$904  [TP15SQ]  26.79,108.17 0 bottom
E$905  [TP15SQ]  29.47,108.17 0 bottom
E$906  [TP15SQ]  28.25,108.17 0 bottom
E$907  [TP15SQ]  30.57,108.17 0 bottom
E$908  [TP15SQ]  31.82,108.17 0 bottom
E$909  [TP15SQ]  25.33,106.71 0 bottom
E$910  [TP15SQ]  26.79,106.71 0 bottom
E$911  [TP15SQ]  29.47,106.71 0 bottom
E$912  [TP15SQ]  28.25,106.71 0 bottom
E$913  [TP15SQ]  30.57,106.71 0 bottom
E$914  [TP15SQ]  31.82,106.71 0 bottom
E$915  [TP15SQ]  25.33,105.31 0 bottom
E$916  [TP15SQ]  26.79,105.31 0 bottom
E$917  [TP15SQ]  29.47,105.31 0 bottom
E$918  [TP15SQ]  28.25,105.31 0 bottom
E$919  [TP15SQ]  30.57,105.31 0 bottom
E$920  [TP15SQ]  31.82,105.31 0 bottom
E$921  [TP15SQ]  25.33,103.91 0 bottom
E$922  [TP15SQ]  26.79,103.91 0 bottom
E$923  [TP15SQ]  29.47,103.91 0 bottom
E$924  [TP15SQ]  28.25,103.91 0 bottom
E$925  [TP15SQ]  30.57,103.91 0 bottom
E$926  [TP15SQ]  31.82,103.91 0 bottom
E$927  [TP15SQ]  25.33,102.44 0 bottom
E$928  [TP15SQ]  26.79,102.44 0 bottom
E$929  [TP15SQ]  29.47,102.44 0 bottom
E$930  [TP15SQ]  28.25,102.44 0 bottom
E$931  [TP15SQ]  30.57,102.44 0 bottom
E$932  [TP15SQ]  31.82,102.44 0 bottom
E$933  [TP15SQ]  25.33,101.04 0 bottom
E$934  [TP15SQ]  26.79,101.04 0 bottom
E$935  [TP15SQ]  29.47,101.04 0 bottom
E$936  [TP15SQ]  28.25,101.04 0 bottom
E$937  [TP15SQ]  30.57,101.04 0 bottom
E$938  [TP15SQ]  31.82,101.04 0 bottom
E$939  [TP15SQ]  33.07,108.17 0 bottom
E$940  [TP15SQ]  34.53,108.17 0 bottom
E$941  [TP15SQ]  37.22,108.17 0 bottom
E$942  [TP15SQ]  36,108.17 0 bottom
E$943  [TP15SQ]  38.31,108.17 0 bottom
E$944  [TP15SQ]  39.56,108.17 0 bottom
E$945  [TP15SQ]  33.07,106.71 0 bottom
E$946  [TP15SQ]  34.53,106.71 0 bottom
E$947  [TP15SQ]  37.22,106.71 0 bottom
E$948  [TP15SQ]  36,106.71 0 bottom
E$949  [TP15SQ]  38.31,106.71 0 bottom
E$950  [TP15SQ]  39.56,106.71 0 bottom
E$951  [TP15SQ]  33.07,105.31 0 bottom
E$952  [TP15SQ]  34.53,105.31 0 bottom
E$953  [TP15SQ]  37.22,105.31 0 bottom
E$954  [TP15SQ]  36,105.31 0 bottom
E$955  [TP15SQ]  38.31,105.31 0 bottom
E$956  [TP15SQ]  39.56,105.31 0 bottom
E$957  [TP15SQ]  33.07,103.91 0 bottom
E$958  [TP15SQ]  34.53,103.91 0 bottom
E$959  [TP15SQ]  37.22,103.91 0 bottom
E$960  [TP15SQ]  36,103.91 0 bottom
E$961  [TP15SQ]  38.31,103.91 0 bottom
E$962  [TP15SQ]  39.56,103.91 0 bottom
E$963  [TP15SQ]  33.07,102.44 0 bottom
E$964  [TP15SQ]  34.53,102.44 0 bottom
E$965  [TP15SQ]  37.22,102.44 0 bottom
E$966  [TP15SQ]  36,102.44 0 bottom
E$967  [TP15SQ]  38.31,102.44 0 bottom
E$968  [TP15SQ]  39.56,102.44 0 bottom
E$969  [TP15SQ]  33.07,101.04 0 bottom
E$970  [TP15SQ]  34.53,101.04 0 bottom
E$971  [TP15SQ]  37.22,101.04 0 bottom
E$972  [TP15SQ]  36,101.04 0 bottom
E$973  [TP15SQ]  38.31,101.04 0 bottom
E$974  [TP15SQ]  39.56,101.04 0 bottom
E$975  [TP15SQ]  40.51,108.17 0 bottom
E$976  [TP15SQ]  41.97,108.17 0 bottom
E$977  [TP15SQ]  44.65,108.17 0 bottom
E$978  [TP15SQ]  43.43,108.17 0 bottom
E$979  [TP15SQ]  45.75,108.17 0 bottom
E$980  [TP15SQ]  47,108.17 0 bottom
E$981  [TP15SQ]  40.51,106.71 0 bottom
E$982  [TP15SQ]  41.97,106.71 0 bottom
E$983  [TP15SQ]  44.65,106.71 0 bottom
E$984  [TP15SQ]  43.43,106.71 0 bottom
E$985  [TP15SQ]  45.75,106.71 0 bottom
E$986  [TP15SQ]  47,106.71 0 bottom
E$987  [TP15SQ]  40.51,105.31 0 bottom
E$988  [TP15SQ]  41.97,105.31 0 bottom
E$989  [TP15SQ]  44.65,105.31 0 bottom
E$990  [TP15SQ]  43.43,105.31 0 bottom
E$991  [TP15SQ]  45.75,105.31 0 bottom
E$992  [TP15SQ]  47,105.31 0 bottom
E$993  [TP15SQ]  40.51,103.91 0 bottom
E$994  [TP15SQ]  41.97,103.91 0 bottom
E$995  [TP15SQ]  44.65,103.91 0 bottom
E$996  [TP15SQ]  43.43,103.91 0 bottom
E$997  [TP15SQ]  45.75,103.91 0 bottom
E$998  [TP15SQ]  47,103.91 0 bottom
E$999  [TP15SQ]  40.51,102.44 0 bottom
E$1000  [TP15SQ]  41.97,102.44 0 bottom
E$1001  [TP15SQ]  44.65,102.44 0 bottom
E$1002  [TP15SQ]  43.43,102.44 0 bottom
E$1003  [TP15SQ]  45.75,102.44 0 bottom
E$1004  [TP15SQ]  47,102.44 0 bottom
E$1005  [TP15SQ]  40.51,101.04 0 bottom
E$1006  [TP15SQ]  41.97,101.04 0 bottom
E$1007  [TP15SQ]  44.65,101.04 0 bottom
E$1008  [TP15SQ]  43.43,101.04 0 bottom
E$1009  [TP15SQ]  45.75,101.04 0 bottom
E$1010  [TP15SQ]  47,101.04 0 bottom
E$1011  [TP15SQ]  17.89,100.04 0 bottom
E$1012  [TP15SQ]  19.35,100.04 0 bottom
E$1013  [TP15SQ]  22.04,100.04 0 bottom
E$1014  [TP15SQ]  20.82,100.04 0 bottom
E$1015  [TP15SQ]  23.13,100.04 0 bottom
E$1016  [TP15SQ]  24.38,100.04 0 bottom
E$1017  [TP15SQ]  17.89,98.57 0 bottom
E$1018  [TP15SQ]  19.35,98.57 0 bottom
E$1019  [TP15SQ]  22.04,98.57 0 bottom
E$1020  [TP15SQ]  20.82,98.57 0 bottom
E$1021  [TP15SQ]  23.13,98.57 0 bottom
E$1022  [TP15SQ]  24.38,98.57 0 bottom
E$1023  [TP15SQ]  17.89,97.17 0 bottom
E$1024  [TP15SQ]  19.35,97.17 0 bottom
E$1025  [TP15SQ]  22.04,97.17 0 bottom
E$1026  [TP15SQ]  20.82,97.17 0 bottom
E$1027  [TP15SQ]  23.13,97.17 0 bottom
E$1028  [TP15SQ]  24.38,97.17 0 bottom
E$1029  [TP15SQ]  17.89,95.77 0 bottom
E$1030  [TP15SQ]  19.35,95.77 0 bottom
E$1031  [TP15SQ]  22.04,95.77 0 bottom
E$1032  [TP15SQ]  20.82,95.77 0 bottom
E$1033  [TP15SQ]  23.13,95.77 0 bottom
E$1034  [TP15SQ]  24.38,95.77 0 bottom
E$1035  [TP15SQ]  17.89,94.31 0 bottom
E$1036  [TP15SQ]  19.35,94.31 0 bottom
E$1037  [TP15SQ]  22.04,94.31 0 bottom
E$1038  [TP15SQ]  20.82,94.31 0 bottom
E$1039  [TP15SQ]  23.13,94.31 0 bottom
E$1040  [TP15SQ]  24.38,94.31 0 bottom
E$1041  [TP15SQ]  17.89,92.9 0 bottom
E$1042  [TP15SQ]  19.35,92.9 0 bottom
E$1043  [TP15SQ]  22.04,92.9 0 bottom
E$1044  [TP15SQ]  20.82,92.9 0 bottom
E$1045  [TP15SQ]  23.13,92.9 0 bottom
E$1046  [TP15SQ]  24.38,92.9 0 bottom
E$1047  [TP15SQ]  25.33,100.04 0 bottom
E$1048  [TP15SQ]  26.79,100.04 0 bottom
E$1049  [TP15SQ]  29.47,100.04 0 bottom
E$1050  [TP15SQ]  28.25,100.04 0 bottom
E$1051  [TP15SQ]  30.57,100.04 0 bottom
E$1052  [TP15SQ]  31.82,100.04 0 bottom
E$1053  [TP15SQ]  25.33,98.57 0 bottom
E$1054  [TP15SQ]  26.79,98.57 0 bottom
E$1055  [TP15SQ]  29.47,98.57 0 bottom
E$1056  [TP15SQ]  28.25,98.57 0 bottom
E$1057  [TP15SQ]  30.57,98.57 0 bottom
E$1058  [TP15SQ]  31.82,98.57 0 bottom
E$1059  [TP15SQ]  25.33,97.17 0 bottom
E$1060  [TP15SQ]  26.79,97.17 0 bottom
E$1061  [TP15SQ]  29.47,97.17 0 bottom
E$1062  [TP15SQ]  28.25,97.17 0 bottom
E$1063  [TP15SQ]  30.57,97.17 0 bottom
E$1064  [TP15SQ]  31.82,97.17 0 bottom
E$1065  [TP15SQ]  25.33,95.77 0 bottom
E$1066  [TP15SQ]  26.79,95.77 0 bottom
E$1067  [TP15SQ]  29.47,95.77 0 bottom
E$1068  [TP15SQ]  28.25,95.77 0 bottom
E$1069  [TP15SQ]  30.57,95.77 0 bottom
E$1070  [TP15SQ]  31.82,95.77 0 bottom
E$1071  [TP15SQ]  25.33,94.31 0 bottom
E$1072  [TP15SQ]  26.79,94.31 0 bottom
E$1073  [TP15SQ]  29.47,94.31 0 bottom
E$1074  [TP15SQ]  28.25,94.31 0 bottom
E$1075  [TP15SQ]  30.57,94.31 0 bottom
E$1076  [TP15SQ]  31.82,94.31 0 bottom
E$1077  [TP15SQ]  25.33,92.9 0 bottom
E$1078  [TP15SQ]  26.79,92.9 0 bottom
E$1079  [TP15SQ]  29.47,92.9 0 bottom
E$1080  [TP15SQ]  28.25,92.9 0 bottom
E$1081  [TP15SQ]  30.57,92.9 0 bottom
E$1082  [TP15SQ]  31.82,92.9 0 bottom
E$1083  [TP15SQ]  33.07,100.04 0 bottom
E$1084  [TP15SQ]  34.53,100.04 0 bottom
E$1085  [TP15SQ]  37.22,100.04 0 bottom
E$1086  [TP15SQ]  36,100.04 0 bottom
E$1087  [TP15SQ]  38.31,100.04 0 bottom
E$1088  [TP15SQ]  39.56,100.04 0 bottom
E$1089  [TP15SQ]  33.07,98.57 0 bottom
E$1090  [TP15SQ]  34.53,98.57 0 bottom
E$1091  [TP15SQ]  37.22,98.57 0 bottom
E$1092  [TP15SQ]  36,98.57 0 bottom
E$1093  [TP15SQ]  38.31,98.57 0 bottom
E$1094  [TP15SQ]  39.56,98.57 0 bottom
E$1095  [TP15SQ]  33.07,97.17 0 bottom
E$1096  [TP15SQ]  34.53,97.17 0 bottom
E$1097  [TP15SQ]  37.22,97.17 0 bottom
E$1098  [TP15SQ]  36,97.17 0 bottom
E$1099  [TP15SQ]  38.31,97.17 0 bottom
E$1100  [TP15SQ]  39.56,97.17 0 bottom
E$1101  [TP15SQ]  33.07,95.77 0 bottom
E$1102  [TP15SQ]  34.53,95.77 0 bottom
E$1103  [TP15SQ]  37.22,95.77 0 bottom
E$1104  [TP15SQ]  36,95.77 0 bottom
E$1105  [TP15SQ]  38.31,95.77 0 bottom
E$1106  [TP15SQ]  39.56,95.77 0 bottom
E$1107  [TP15SQ]  33.07,94.31 0 bottom
E$1108  [TP15SQ]  34.53,94.31 0 bottom
E$1109  [TP15SQ]  37.22,94.31 0 bottom
E$1110  [TP15SQ]  36,94.31 0 bottom
E$1111  [TP15SQ]  38.31,94.31 0 bottom
E$1112  [TP15SQ]  39.56,94.31 0 bottom
E$1113  [TP15SQ]  33.07,92.9 0 bottom
E$1114  [TP15SQ]  34.53,92.9 0 bottom
E$1115  [TP15SQ]  37.22,92.9 0 bottom
E$1116  [TP15SQ]  36,92.9 0 bottom
E$1117  [TP15SQ]  38.31,92.9 0 bottom
E$1118  [TP15SQ]  39.56,92.9 0 bottom
E$1119  [TP15SQ]  40.51,100.04 0 bottom
E$1120  [TP15SQ]  41.97,100.04 0 bottom
E$1121  [TP15SQ]  44.65,100.04 0 bottom
E$1122  [TP15SQ]  43.43,100.04 0 bottom
E$1123  [TP15SQ]  45.75,100.04 0 bottom
E$1124  [TP15SQ]  47,100.04 0 bottom
E$1125  [TP15SQ]  40.51,98.57 0 bottom
E$1126  [TP15SQ]  41.97,98.57 0 bottom
E$1127  [TP15SQ]  44.65,98.57 0 bottom
E$1128  [TP15SQ]  43.43,98.57 0 bottom
E$1129  [TP15SQ]  45.75,98.57 0 bottom
E$1130  [TP15SQ]  47,98.57 0 bottom
E$1131  [TP15SQ]  40.51,97.17 0 bottom
E$1132  [TP15SQ]  41.97,97.17 0 bottom
E$1133  [TP15SQ]  44.65,97.17 0 bottom
E$1134  [TP15SQ]  43.43,97.17 0 bottom
E$1135  [TP15SQ]  45.75,97.17 0 bottom
E$1136  [TP15SQ]  47,97.17 0 bottom
E$1137  [TP15SQ]  40.51,95.77 0 bottom
E$1138  [TP15SQ]  41.97,95.77 0 bottom
E$1139  [TP15SQ]  44.65,95.77 0 bottom
E$1140  [TP15SQ]  43.43,95.77 0 bottom
E$1141  [TP15SQ]  45.75,95.77 0 bottom
E$1142  [TP15SQ]  47,95.77 0 bottom
E$1143  [TP15SQ]  40.51,94.31 0 bottom
E$1144  [TP15SQ]  41.97,94.31 0 bottom
E$1145  [TP15SQ]  44.65,94.31 0 bottom
E$1146  [TP15SQ]  43.43,94.31 0 bottom
E$1147  [TP15SQ]  45.75,94.31 0 bottom
E$1148  [TP15SQ]  47,94.31 0 bottom
E$1149  [TP15SQ]  40.51,92.9 0 bottom
E$1150  [TP15SQ]  41.97,92.9 0 bottom
E$1151  [TP15SQ]  44.65,92.9 0 bottom
E$1152  [TP15SQ]  43.43,92.9 0 bottom
E$1153  [TP15SQ]  45.75,92.9 0 bottom
E$1154  [TP15SQ]  47,92.9 0 bottom
E$1155  [TP15SQ]  47.64,123.78 0 bottom
E$1156  [TP15SQ]  49.1,123.78 0 bottom
E$1157  [TP15SQ]  51.79,123.78 0 bottom
E$1158  [TP15SQ]  50.57,123.78 0 bottom
E$1159  [TP15SQ]  52.88,123.78 0 bottom
E$1160  [TP15SQ]  54.13,123.78 0 bottom
E$1161  [TP15SQ]  47.64,122.32 0 bottom
E$1162  [TP15SQ]  49.1,122.32 0 bottom
E$1163  [TP15SQ]  51.79,122.32 0 bottom
E$1164  [TP15SQ]  50.57,122.32 0 bottom
E$1165  [TP15SQ]  52.88,122.32 0 bottom
E$1166  [TP15SQ]  54.13,122.32 0 bottom
E$1167  [TP15SQ]  47.64,120.91 0 bottom
E$1168  [TP15SQ]  49.1,120.91 0 bottom
E$1169  [TP15SQ]  51.79,120.91 0 bottom
E$1170  [TP15SQ]  50.57,120.91 0 bottom
E$1171  [TP15SQ]  52.88,120.91 0 bottom
E$1172  [TP15SQ]  54.13,120.91 0 bottom
E$1173  [TP15SQ]  47.64,119.51 0 bottom
E$1174  [TP15SQ]  49.1,119.51 0 bottom
E$1175  [TP15SQ]  51.79,119.51 0 bottom
E$1176  [TP15SQ]  50.57,119.51 0 bottom
E$1177  [TP15SQ]  52.88,119.51 0 bottom
E$1178  [TP15SQ]  54.13,119.51 0 bottom
E$1179  [TP15SQ]  47.64,118.05 0 bottom
E$1180  [TP15SQ]  49.1,118.05 0 bottom
E$1181  [TP15SQ]  51.79,118.05 0 bottom
E$1182  [TP15SQ]  50.57,118.05 0 bottom
E$1183  [TP15SQ]  52.88,118.05 0 bottom
E$1184  [TP15SQ]  54.13,118.05 0 bottom
E$1185  [TP15SQ]  47.64,116.65 0 bottom
E$1186  [TP15SQ]  49.1,116.65 0 bottom
E$1187  [TP15SQ]  51.79,116.65 0 bottom
E$1188  [TP15SQ]  50.57,116.65 0 bottom
E$1189  [TP15SQ]  52.88,116.65 0 bottom
E$1190  [TP15SQ]  54.13,116.65 0 bottom
E$1191  [TP15SQ]  55.08,123.78 0 bottom
E$1192  [TP15SQ]  56.54,123.78 0 bottom
E$1193  [TP15SQ]  59.22,123.78 0 bottom
E$1194  [TP15SQ]  58,123.78 0 bottom
E$1195  [TP15SQ]  60.32,123.78 0 bottom
E$1196  [TP15SQ]  61.57,123.78 0 bottom
E$1197  [TP15SQ]  55.08,122.32 0 bottom
E$1198  [TP15SQ]  56.54,122.32 0 bottom
E$1199  [TP15SQ]  59.22,122.32 0 bottom
E$1200  [TP15SQ]  58,122.32 0 bottom
E$1201  [TP15SQ]  60.32,122.32 0 bottom
E$1202  [TP15SQ]  61.57,122.32 0 bottom
E$1203  [TP15SQ]  55.08,120.91 0 bottom
E$1204  [TP15SQ]  56.54,120.91 0 bottom
E$1205  [TP15SQ]  59.22,120.91 0 bottom
E$1206  [TP15SQ]  58,120.91 0 bottom
E$1207  [TP15SQ]  60.32,120.91 0 bottom
E$1208  [TP15SQ]  61.57,120.91 0 bottom
E$1209  [TP15SQ]  55.08,119.51 0 bottom
E$1210  [TP15SQ]  56.54,119.51 0 bottom
E$1211  [TP15SQ]  59.22,119.51 0 bottom
E$1212  [TP15SQ]  58,119.51 0 bottom
E$1213  [TP15SQ]  60.32,119.51 0 bottom
E$1214  [TP15SQ]  61.57,119.51 0 bottom
E$1215  [TP15SQ]  55.08,118.05 0 bottom
E$1216  [TP15SQ]  56.54,118.05 0 bottom
E$1217  [TP15SQ]  59.22,118.05 0 bottom
E$1218  [TP15SQ]  58,118.05 0 bottom
E$1219  [TP15SQ]  60.32,118.05 0 bottom
E$1220  [TP15SQ]  61.57,118.05 0 bottom
E$1221  [TP15SQ]  55.08,116.65 0 bottom
E$1222  [TP15SQ]  56.54,116.65 0 bottom
E$1223  [TP15SQ]  59.22,116.65 0 bottom
E$1224  [TP15SQ]  58,116.65 0 bottom
E$1225  [TP15SQ]  60.32,116.65 0 bottom
E$1226  [TP15SQ]  61.57,116.65 0 bottom
E$1227  [TP15SQ]  62.82,123.78 0 bottom
E$1228  [TP15SQ]  64.28,123.78 0 bottom
E$1229  [TP15SQ]  66.96,123.78 0 bottom
E$1230  [TP15SQ]  65.75,123.78 0 bottom
E$1231  [TP15SQ]  68.06,123.78 0 bottom
E$1232  [TP15SQ]  69.31,123.78 0 bottom
E$1233  [TP15SQ]  62.82,122.32 0 bottom
E$1234  [TP15SQ]  64.28,122.32 0 bottom
E$1235  [TP15SQ]  66.96,122.32 0 bottom
E$1236  [TP15SQ]  65.75,122.32 0 bottom
E$1237  [TP15SQ]  68.06,122.32 0 bottom
E$1238  [TP15SQ]  69.31,122.32 0 bottom
E$1239  [TP15SQ]  62.82,120.91 0 bottom
E$1240  [TP15SQ]  64.28,120.91 0 bottom
E$1241  [TP15SQ]  66.96,120.91 0 bottom
E$1242  [TP15SQ]  65.75,120.91 0 bottom
E$1243  [TP15SQ]  68.06,120.91 0 bottom
E$1244  [TP15SQ]  69.31,120.91 0 bottom
E$1245  [TP15SQ]  62.82,119.51 0 bottom
E$1246  [TP15SQ]  64.28,119.51 0 bottom
E$1247  [TP15SQ]  66.96,119.51 0 bottom
E$1248  [TP15SQ]  65.75,119.51 0 bottom
E$1249  [TP15SQ]  68.06,119.51 0 bottom
E$1250  [TP15SQ]  69.31,119.51 0 bottom
E$1251  [TP15SQ]  62.82,118.05 0 bottom
E$1252  [TP15SQ]  64.28,118.05 0 bottom
E$1253  [TP15SQ]  66.96,118.05 0 bottom
E$1254  [TP15SQ]  65.75,118.05 0 bottom
E$1255  [TP15SQ]  68.06,118.05 0 bottom
E$1256  [TP15SQ]  69.31,118.05 0 bottom
E$1257  [TP15SQ]  62.82,116.65 0 bottom
E$1258  [TP15SQ]  64.28,116.65 0 bottom
E$1259  [TP15SQ]  66.96,116.65 0 bottom
E$1260  [TP15SQ]  65.75,116.65 0 bottom
E$1261  [TP15SQ]  68.06,116.65 0 bottom
E$1262  [TP15SQ]  69.31,116.65 0 bottom
E$1263  [TP15SQ]  70.26,123.78 0 bottom
E$1264  [TP15SQ]  71.72,123.78 0 bottom
E$1265  [TP15SQ]  74.4,123.78 0 bottom
E$1266  [TP15SQ]  73.18,123.78 0 bottom
E$1267  [TP15SQ]  75.5,123.78 0 bottom
E$1268  [TP15SQ]  76.75,123.78 0 bottom
E$1269  [TP15SQ]  70.26,122.32 0 bottom
E$1270  [TP15SQ]  71.72,122.32 0 bottom
E$1271  [TP15SQ]  74.4,122.32 0 bottom
E$1272  [TP15SQ]  73.18,122.32 0 bottom
E$1273  [TP15SQ]  75.5,122.32 0 bottom
E$1274  [TP15SQ]  76.75,122.32 0 bottom
E$1275  [TP15SQ]  70.26,120.91 0 bottom
E$1276  [TP15SQ]  71.72,120.91 0 bottom
E$1277  [TP15SQ]  74.4,120.91 0 bottom
E$1278  [TP15SQ]  73.18,120.91 0 bottom
E$1279  [TP15SQ]  75.5,120.91 0 bottom
E$1280  [TP15SQ]  76.75,120.91 0 bottom
E$1281  [TP15SQ]  70.26,119.51 0 bottom
E$1282  [TP15SQ]  71.72,119.51 0 bottom
E$1283  [TP15SQ]  74.4,119.51 0 bottom
E$1284  [TP15SQ]  73.18,119.51 0 bottom
E$1285  [TP15SQ]  75.5,119.51 0 bottom
E$1286  [TP15SQ]  76.75,119.51 0 bottom
E$1287  [TP15SQ]  70.26,118.05 0 bottom
E$1288  [TP15SQ]  71.72,118.05 0 bottom
E$1289  [TP15SQ]  74.4,118.05 0 bottom
E$1290  [TP15SQ]  73.18,118.05 0 bottom
E$1291  [TP15SQ]  75.5,118.05 0 bottom
E$1292  [TP15SQ]  76.75,118.05 0 bottom
E$1293  [TP15SQ]  70.26,116.65 0 bottom
E$1294  [TP15SQ]  71.72,116.65 0 bottom
E$1295  [TP15SQ]  74.4,116.65 0 bottom
E$1296  [TP15SQ]  73.18,116.65 0 bottom
E$1297  [TP15SQ]  75.5,116.65 0 bottom
E$1298  [TP15SQ]  76.75,116.65 0 bottom
E$1299  [TP15SQ]  47.64,115.64 0 bottom
E$1300  [TP15SQ]  49.1,115.64 0 bottom
E$1301  [TP15SQ]  51.79,115.64 0 bottom
E$1302  [TP15SQ]  50.57,115.64 0 bottom
E$1303  [TP15SQ]  52.88,115.64 0 bottom
E$1304  [TP15SQ]  54.13,115.64 0 bottom
E$1305  [TP15SQ]  47.64,114.18 0 bottom
E$1306  [TP15SQ]  49.1,114.18 0 bottom
E$1307  [TP15SQ]  51.79,114.18 0 bottom
E$1308  [TP15SQ]  50.57,114.18 0 bottom
E$1309  [TP15SQ]  52.88,114.18 0 bottom
E$1310  [TP15SQ]  54.13,114.18 0 bottom
E$1311  [TP15SQ]  47.64,112.78 0 bottom
E$1312  [TP15SQ]  49.1,112.78 0 bottom
E$1313  [TP15SQ]  51.79,112.78 0 bottom
E$1314  [TP15SQ]  50.57,112.78 0 bottom
E$1315  [TP15SQ]  52.88,112.78 0 bottom
E$1316  [TP15SQ]  54.13,112.78 0 bottom
E$1317  [TP15SQ]  47.64,111.37 0 bottom
E$1318  [TP15SQ]  49.1,111.37 0 bottom
E$1319  [TP15SQ]  51.79,111.37 0 bottom
E$1320  [TP15SQ]  50.57,111.37 0 bottom
E$1321  [TP15SQ]  52.88,111.37 0 bottom
E$1322  [TP15SQ]  54.13,111.37 0 bottom
E$1323  [TP15SQ]  47.64,109.91 0 bottom
E$1324  [TP15SQ]  49.1,109.91 0 bottom
E$1325  [TP15SQ]  51.79,109.91 0 bottom
E$1326  [TP15SQ]  50.57,109.91 0 bottom
E$1327  [TP15SQ]  52.88,109.91 0 bottom
E$1328  [TP15SQ]  54.13,109.91 0 bottom
E$1329  [TP15SQ]  47.64,108.51 0 bottom
E$1330  [TP15SQ]  49.1,108.51 0 bottom
E$1331  [TP15SQ]  51.79,108.51 0 bottom
E$1332  [TP15SQ]  50.57,108.51 0 bottom
E$1333  [TP15SQ]  52.88,108.51 0 bottom
E$1334  [TP15SQ]  54.13,108.51 0 bottom
E$1335  [TP15SQ]  55.08,115.64 0 bottom
E$1336  [TP15SQ]  56.54,115.64 0 bottom
E$1337  [TP15SQ]  59.22,115.64 0 bottom
E$1338  [TP15SQ]  58,115.64 0 bottom
E$1339  [TP15SQ]  60.32,115.64 0 bottom
E$1340  [TP15SQ]  61.57,115.64 0 bottom
E$1341  [TP15SQ]  55.08,114.18 0 bottom
E$1342  [TP15SQ]  56.54,114.18 0 bottom
E$1343  [TP15SQ]  59.22,114.18 0 bottom
E$1344  [TP15SQ]  58,114.18 0 bottom
E$1345  [TP15SQ]  60.32,114.18 0 bottom
E$1346  [TP15SQ]  61.57,114.18 0 bottom
E$1347  [TP15SQ]  55.08,112.78 0 bottom
E$1348  [TP15SQ]  56.54,112.78 0 bottom
E$1349  [TP15SQ]  59.22,112.78 0 bottom
E$1350  [TP15SQ]  58,112.78 0 bottom
E$1351  [TP15SQ]  60.32,112.78 0 bottom
E$1352  [TP15SQ]  61.57,112.78 0 bottom
E$1353  [TP15SQ]  55.08,111.37 0 bottom
E$1354  [TP15SQ]  56.54,111.37 0 bottom
E$1355  [TP15SQ]  59.22,111.37 0 bottom
E$1356  [TP15SQ]  58,111.37 0 bottom
E$1357  [TP15SQ]  60.32,111.37 0 bottom
E$1358  [TP15SQ]  61.57,111.37 0 bottom
E$1359  [TP15SQ]  55.08,109.91 0 bottom
E$1360  [TP15SQ]  56.54,109.91 0 bottom
E$1361  [TP15SQ]  59.22,109.91 0 bottom
E$1362  [TP15SQ]  58,109.91 0 bottom
E$1363  [TP15SQ]  60.32,109.91 0 bottom
E$1364  [TP15SQ]  61.57,109.91 0 bottom
E$1365  [TP15SQ]  55.08,108.51 0 bottom
E$1366  [TP15SQ]  56.54,108.51 0 bottom
E$1367  [TP15SQ]  59.22,108.51 0 bottom
E$1368  [TP15SQ]  58,108.51 0 bottom
E$1369  [TP15SQ]  60.32,108.51 0 bottom
E$1370  [TP15SQ]  61.57,108.51 0 bottom
E$1371  [TP15SQ]  62.82,115.64 0 bottom
E$1372  [TP15SQ]  64.28,115.64 0 bottom
E$1373  [TP15SQ]  66.96,115.64 0 bottom
E$1374  [TP15SQ]  65.75,115.64 0 bottom
E$1375  [TP15SQ]  68.06,115.64 0 bottom
E$1376  [TP15SQ]  69.31,115.64 0 bottom
E$1377  [TP15SQ]  62.82,114.18 0 bottom
E$1378  [TP15SQ]  64.28,114.18 0 bottom
E$1379  [TP15SQ]  66.96,114.18 0 bottom
E$1380  [TP15SQ]  65.75,114.18 0 bottom
E$1381  [TP15SQ]  68.06,114.18 0 bottom
E$1382  [TP15SQ]  69.31,114.18 0 bottom
E$1383  [TP15SQ]  62.82,112.78 0 bottom
E$1384  [TP15SQ]  64.28,112.78 0 bottom
E$1385  [TP15SQ]  66.96,112.78 0 bottom
E$1386  [TP15SQ]  65.75,112.78 0 bottom
E$1387  [TP15SQ]  68.06,112.78 0 bottom
E$1388  [TP15SQ]  69.31,112.78 0 bottom
E$1389  [TP15SQ]  62.82,111.37 0 bottom
E$1390  [TP15SQ]  64.28,111.37 0 bottom
E$1391  [TP15SQ]  66.96,111.37 0 bottom
E$1392  [TP15SQ]  65.75,111.37 0 bottom
E$1393  [TP15SQ]  68.06,111.37 0 bottom
E$1394  [TP15SQ]  69.31,111.37 0 bottom
E$1395  [TP15SQ]  62.82,109.91 0 bottom
E$1396  [TP15SQ]  64.28,109.91 0 bottom
E$1397  [TP15SQ]  66.96,109.91 0 bottom
E$1398  [TP15SQ]  65.75,109.91 0 bottom
E$1399  [TP15SQ]  68.06,109.91 0 bottom
E$1400  [TP15SQ]  69.31,109.91 0 bottom
E$1401  [TP15SQ]  62.82,108.51 0 bottom
E$1402  [TP15SQ]  64.28,108.51 0 bottom
E$1403  [TP15SQ]  66.96,108.51 0 bottom
E$1404  [TP15SQ]  65.75,108.51 0 bottom
E$1405  [TP15SQ]  68.06,108.51 0 bottom
E$1406  [TP15SQ]  69.31,108.51 0 bottom
E$1407  [TP15SQ]  70.26,115.64 0 bottom
E$1408  [TP15SQ]  71.72,115.64 0 bottom
E$1409  [TP15SQ]  74.4,115.64 0 bottom
E$1410  [TP15SQ]  73.18,115.64 0 bottom
E$1411  [TP15SQ]  75.5,115.64 0 bottom
E$1412  [TP15SQ]  76.75,115.64 0 bottom
E$1413  [TP15SQ]  70.26,114.18 0 bottom
E$1414  [TP15SQ]  71.72,114.18 0 bottom
E$1415  [TP15SQ]  74.4,114.18 0 bottom
E$1416  [TP15SQ]  73.18,114.18 0 bottom
E$1417  [TP15SQ]  75.5,114.18 0 bottom
E$1418  [TP15SQ]  76.75,114.18 0 bottom
E$1419  [TP15SQ]  70.26,112.78 0 bottom
E$1420  [TP15SQ]  71.72,112.78 0 bottom
E$1421  [TP15SQ]  74.4,112.78 0 bottom
E$1422  [TP15SQ]  73.18,112.78 0 bottom
E$1423  [TP15SQ]  75.5,112.78 0 bottom
E$1424  [TP15SQ]  76.75,112.78 0 bottom
E$1425  [TP15SQ]  70.26,111.37 0 bottom
E$1426  [TP15SQ]  71.72,111.37 0 bottom
E$1427  [TP15SQ]  74.4,111.37 0 bottom
E$1428  [TP15SQ]  73.18,111.37 0 bottom
E$1429  [TP15SQ]  75.5,111.37 0 bottom
E$1430  [TP15SQ]  76.75,111.37 0 bottom
E$1431  [TP15SQ]  70.26,109.91 0 bottom
E$1432  [TP15SQ]  71.72,109.91 0 bottom
E$1433  [TP15SQ]  74.4,109.91 0 bottom
E$1434  [TP15SQ]  73.18,109.91 0 bottom
E$1435  [TP15SQ]  75.5,109.91 0 bottom
E$1436  [TP15SQ]  76.75,109.91 0 bottom
E$1437  [TP15SQ]  70.26,108.51 0 bottom
E$1438  [TP15SQ]  71.72,108.51 0 bottom
E$1439  [TP15SQ]  74.4,108.51 0 bottom
E$1440  [TP15SQ]  73.18,108.51 0 bottom
E$1441  [TP15SQ]  75.5,108.51 0 bottom
E$1442  [TP15SQ]  76.75,108.51 0 bottom
E$1443  [TP15SQ]  47.67,108.17 0 bottom
E$1444  [TP15SQ]  49.13,108.17 0 bottom
E$1445  [TP15SQ]  51.82,108.17 0 bottom
E$1446  [TP15SQ]  50.6,108.17 0 bottom
E$1447  [TP15SQ]  52.91,108.17 0 bottom
E$1448  [TP15SQ]  54.16,108.17 0 bottom
E$1449  [TP15SQ]  47.67,106.71 0 bottom
E$1450  [TP15SQ]  49.13,106.71 0 bottom
E$1451  [TP15SQ]  51.82,106.71 0 bottom
E$1452  [TP15SQ]  50.6,106.71 0 bottom
E$1453  [TP15SQ]  52.91,106.71 0 bottom
E$1454  [TP15SQ]  54.16,106.71 0 bottom
E$1455  [TP15SQ]  47.67,105.31 0 bottom
E$1456  [TP15SQ]  49.13,105.31 0 bottom
E$1457  [TP15SQ]  51.82,105.31 0 bottom
E$1458  [TP15SQ]  50.6,105.31 0 bottom
E$1459  [TP15SQ]  52.91,105.31 0 bottom
E$1460  [TP15SQ]  54.16,105.31 0 bottom
E$1461  [TP15SQ]  47.67,103.91 0 bottom
E$1462  [TP15SQ]  49.13,103.91 0 bottom
E$1463  [TP15SQ]  51.82,103.91 0 bottom
E$1464  [TP15SQ]  50.6,103.91 0 bottom
E$1465  [TP15SQ]  52.91,103.91 0 bottom
E$1466  [TP15SQ]  54.16,103.91 0 bottom
E$1467  [TP15SQ]  47.67,102.44 0 bottom
E$1468  [TP15SQ]  49.13,102.44 0 bottom
E$1469  [TP15SQ]  51.82,102.44 0 bottom
E$1470  [TP15SQ]  50.6,102.44 0 bottom
E$1471  [TP15SQ]  52.91,102.44 0 bottom
E$1472  [TP15SQ]  54.16,102.44 0 bottom
E$1473  [TP15SQ]  47.67,101.04 0 bottom
E$1474  [TP15SQ]  49.13,101.04 0 bottom
E$1475  [TP15SQ]  51.82,101.04 0 bottom
E$1476  [TP15SQ]  50.6,101.04 0 bottom
E$1477  [TP15SQ]  52.91,101.04 0 bottom
E$1478  [TP15SQ]  54.16,101.04 0 bottom
E$1479  [TP15SQ]  55.11,108.17 0 bottom
E$1480  [TP15SQ]  56.57,108.17 0 bottom
E$1481  [TP15SQ]  59.25,108.17 0 bottom
E$1482  [TP15SQ]  58.03,108.17 0 bottom
E$1483  [TP15SQ]  60.35,108.17 0 bottom
E$1484  [TP15SQ]  61.6,108.17 0 bottom
E$1485  [TP15SQ]  55.11,106.71 0 bottom
E$1486  [TP15SQ]  56.57,106.71 0 bottom
E$1487  [TP15SQ]  59.25,106.71 0 bottom
E$1488  [TP15SQ]  58.03,106.71 0 bottom
E$1489  [TP15SQ]  60.35,106.71 0 bottom
E$1490  [TP15SQ]  61.6,106.71 0 bottom
E$1491  [TP15SQ]  55.11,105.31 0 bottom
E$1492  [TP15SQ]  56.57,105.31 0 bottom
E$1493  [TP15SQ]  59.25,105.31 0 bottom
E$1494  [TP15SQ]  58.03,105.31 0 bottom
E$1495  [TP15SQ]  60.35,105.31 0 bottom
E$1496  [TP15SQ]  61.6,105.31 0 bottom
E$1497  [TP15SQ]  55.11,103.91 0 bottom
E$1498  [TP15SQ]  56.57,103.91 0 bottom
E$1499  [TP15SQ]  59.25,103.91 0 bottom
E$1500  [TP15SQ]  58.03,103.91 0 bottom
E$1501  [TP15SQ]  60.35,103.91 0 bottom
E$1502  [TP15SQ]  61.6,103.91 0 bottom
E$1503  [TP15SQ]  55.11,102.44 0 bottom
E$1504  [TP15SQ]  56.57,102.44 0 bottom
E$1505  [TP15SQ]  59.25,102.44 0 bottom
E$1506  [TP15SQ]  58.03,102.44 0 bottom
E$1507  [TP15SQ]  60.35,102.44 0 bottom
E$1508  [TP15SQ]  61.6,102.44 0 bottom
E$1509  [TP15SQ]  55.11,101.04 0 bottom
E$1510  [TP15SQ]  56.57,101.04 0 bottom
E$1511  [TP15SQ]  59.25,101.04 0 bottom